# EAGLE board LCD&Control2PRNT (EAGLE 9.2.0)
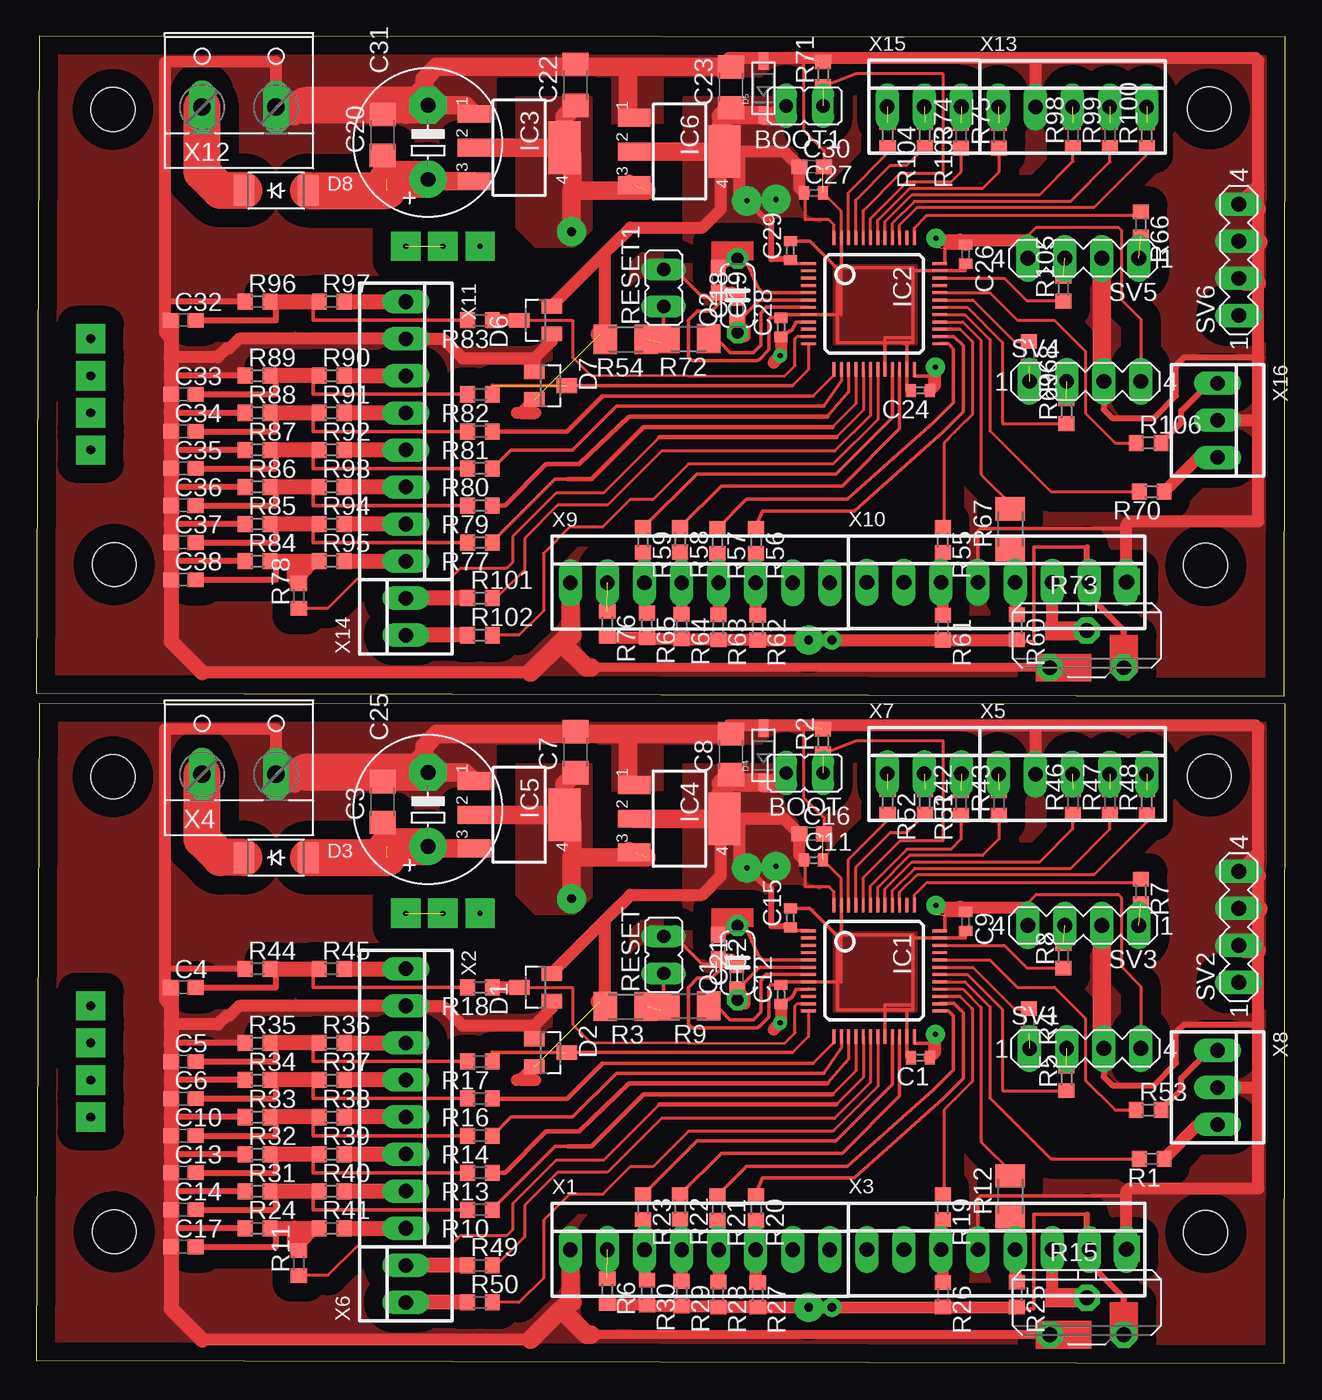
[diagram p0: board, top side]
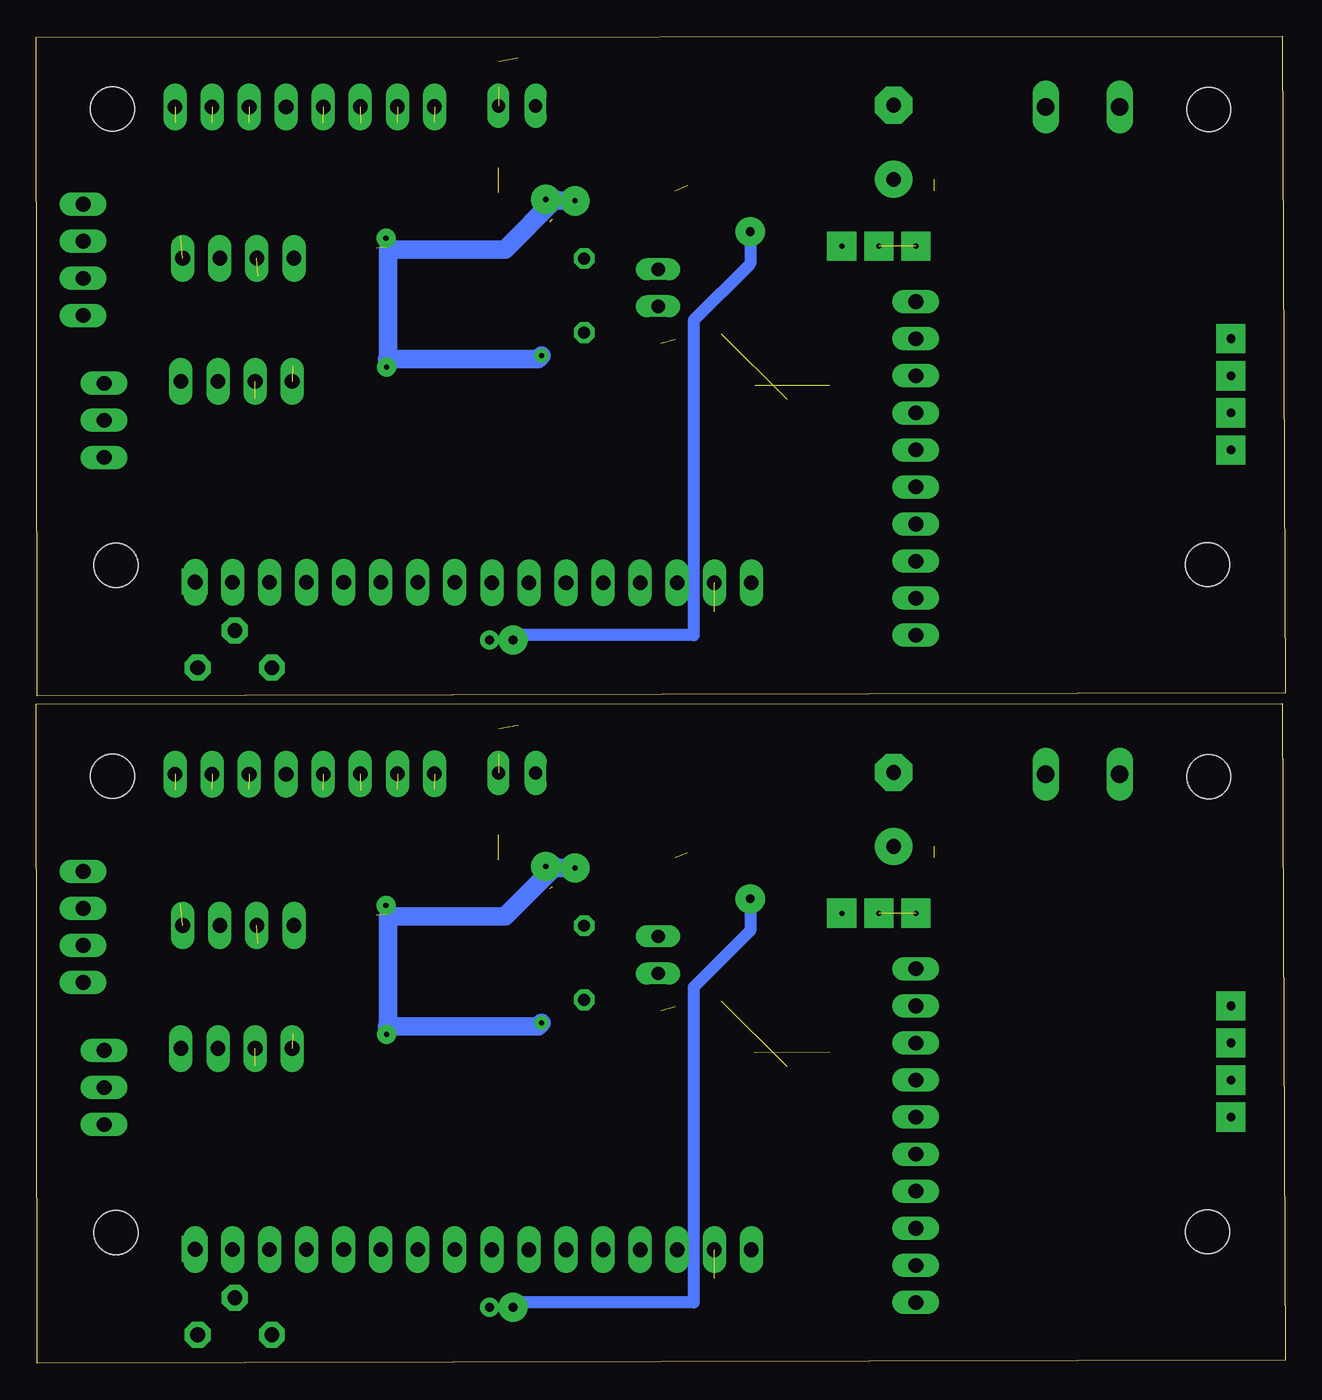
[diagram p1: board, bottom side, seen from below]

Size 85.58 x 90.91 mm. Coordinates in mm from the lower left corner, seen from the top.
Outline: 0,0.19 85.51,0 85.58,45.15 0.19,45.19 0,0.19
Outline: 0,45.91 85.51,45.72 85.58,90.87 0.19,90.91 0,45.91
Copper layers (1*16): Top 0.035mm / dielectric 1.5mm / Bottom 0.035mm
Design rules "DRC LCD part *": minimum track width 7mil, minimum drill 0.6mm, track to track 9mil, track to pad 10mil, pad to pad 12mil, via to via 12mil, smd to smd 2mil, copper to edge 40mil, drill to drill 40mil, minimum pad ring 12mil, minimum via ring 12mil, stop-mask expansion 4mil, vias tented up to drill 0mil, thermal gap 10mil
Holes 3 mm at 5.32,8.99 5.25,40.18 80.37,40.22 80.12,8.94 5.32,54.71 5.25,85.9 80.37,85.94 80.12,54.66

## Footprints (pad centres in the part's own frame; a part is rotated, then mirrored left to right if it is on the bottom)
JP1 = drill 0.914 long: 1 0,-1.27; 2 0,1.27
C0402 = smd 0.7 x 0.9: 1 -0.65,0; 2 0.65,0
C0603 = smd 1.1 x 1: 1 -0.85,0; 2 0.85,0
C1206 = smd 1.6 x 1.8: 1 -1.4,0; 2 1.4,0
E5-10,5 = drill 1.016 pad 2.54: + -2.54,0 | drill 1.016 pad 2.54 octagon: - 2.54,0
SOT23 = smd 1 x 1.4: 1 -0.95,-1.1; 2 0.95,-1.1; 3 0,1.1
SOD128 = smd 1.4 x 2.1: 1 -2.2,0; 2 2.2,0
SOD-123 = smd 1.2 x 0.7: A 1.85,0; C -1.85,0
TQFP48 = smd 0.2 x 1: 1 -2.75,-4.5; 2 -2.25,-4.5; 3 -1.75,-4.5; 4 -1.25,-4.5; 5 -0.75,-4.5; 6 -0.25,-4.5; 7 0.25,-4.5; 8 0.75,-4.5; 9 1.25,-4.5; 10 1.75,-4.5; 11 2.25,-4.5; 12 2.75,-4.5; 25 2.75,4.5; 26 2.25,4.5; 27 1.75,4.5; 28 1.25,4.5; 29 0.75,4.5; 30 0.25,4.5; 31 -0.25,4.5; 32 -0.75,4.5; 33 -1.25,4.5; 34 -1.75,4.5; 35 -2.25,4.5; 36 -2.75,4.5 | smd 1 x 0.2: 13 4.5,-2.75; 14 4.5,-2.25; 15 4.5,-1.75; 16 4.5,-1.25; 17 4.5,-0.75; 18 4.5,-0.25; 19 4.5,0.25; 20 4.5,0.75; 21 4.5,1.25; 22 4.5,1.75; 23 4.5,2.25; 24 4.5,2.75; 37 -4.5,2.75; 38 -4.5,2.25; 39 -4.5,1.75; 40 -4.5,1.25; 41 -4.5,0.75; 42 -4.5,0.25; 43 -4.5,-0.25; 44 -4.5,-0.75; 45 -4.5,-1.25; 46 -4.5,-1.75; 47 -4.5,-2.25; 48 -4.5,-2.75
SOT223 = smd 1.219 x 2.235: 1 -2.311,-3.099; 2 0,-3.099; 3 2.311,-3.099 | smd 3.6 x 2.2: 4 0,3.099
C050-024X044 = drill 0.813 octagon: 1 -2.54,0; 2 2.54,0
R0603 = smd 1 x 1.1: 1 -0.85,0; 2 0.85,0
M1206 = smd 1.6 x 2: 1 -1.4,0; 2 1.4,0
PT-10S = drill 1.016 pad 1.778 octagon: 1 -2.54,-1.27; 2 2.54,-1.27; 3 0,1.27
MA04-1 = drill 1.016 long: 1 -3.81,0; 2 -1.27,0; 3 1.27,0; 4 3.81,0
22-23-2081 = drill 1 long: 1 -8.89,0; 2 -6.35,0; 3 -3.81,0; 4 -1.27,0; 5 1.27,0; 6 3.81,0; 7 6.35,0; 8 8.89,0
W237-132 = drill 1.194 long: 1 -2.54,-0.635; 2 2.54,-0.635
22-23-2051 = drill 1 long: 1 -5.08,0; 2 -2.54,0; 3 0,0; 4 2.54,0; 5 5.08,0
22-23-2021 = drill 1 long: 1 -1.27,0; 2 1.27,0
22-23-2031 = drill 1 long: 1 -2.54,0; 2 0,0; 3 2.54,0

## Placement (x,y rotation side)
BOOT  [JP1]  52.64,40.44 90 top
BOOT1  [JP1]  52.64,86.16 90 top
C1  0.1  [C0402]  60.57,20.93 180 top
C2  22p  [C0603]  46.73,28.49 270 top
C3  0.1  [C1206]  23.72,38.44 90 top
C4  [C0603]  10.07,25.74 0 top
C5  [C0603]  10.07,20.66 0 top
C6  [C0603]  10.07,18.12 0 top
C7  0.1  [C1206]  36.94,41.86 90 top
C8  0.1  [C1206]  47.6,41.71 90 top
C9  0.1  [C0402]  63.67,30.26 270 top
C10  [C0603]  10.07,15.58 0 top
C11  0.1  [C0402]  53.25,34.47 0 top
C12  0.1  [C0402]  51.03,25.25 90 top
C13  [C0603]  10.07,13.04 0 top
C14  [C0603]  10.07,10.5 0 top
C15  0.1  [C0402]  51.66,30.51 90 top
C16  1uF  [C0603]  53.12,36.26 0 top
C17  [C0603]  10.07,7.96 0 top
C18  22p  [C0603]  47.99,72.16 90 top
C19  22p  [C0603]  46.73,74.21 270 top
C20  0.1  [C1206]  23.72,84.16 90 top
C21  22p  [C0603]  47.99,26.44 90 top
C22  0.1  [C1206]  36.94,87.58 90 top
C23  0.1  [C1206]  47.6,87.43 90 top
C24  0.1  [C0402]  60.57,66.65 180 top
C25  470uF  [E5-10,5]  26.84,37.93 90 top
C26  0.1  [C0402]  63.67,75.98 270 top
C27  0.1  [C0402]  53.25,80.19 0 top
C28  0.1  [C0402]  51.03,70.97 90 top
C29  0.1  [C0402]  51.66,76.23 90 top
C30  1uF  [C0603]  53.12,81.98 0 top
C31  470uF  [E5-10,5]  26.84,83.65 90 top
C32  [C0603]  10.07,71.46 0 top
C33  [C0603]  10.07,66.38 0 top
C34  [C0603]  10.07,63.84 0 top
C35  [C0603]  10.07,61.3 0 top
C36  [C0603]  10.07,58.76 0 top
C37  [C0603]  10.07,56.22 0 top
C38  [C0603]  10.07,53.68 0 top
D1  BAT54S  [SOT23]  34.2,25.74 90 top
D2  BAT54S  [SOT23]  35.23,21.26 270 top
D3  PMEG4050EP  [SOD128]  16.42,34.63 0 top
D4  3.6v  [SOD-123]  49.82,41.64 90 top
D5  3.6v  [SOD-123]  49.82,87.36 90 top
D6  BAT54S  [SOT23]  34.2,71.46 90 top
D7  BAT54S  [SOT23]  35.23,66.98 270 top
D8  PMEG4050EP  [SOD128]  16.42,80.35 0 top
IC1  STM32F10XCXT6  [TQFP48]  57.4,26.87 270 top
IC2  STM32F10XCXT6  [TQFP48]  57.4,72.59 270 top
IC3  5V  [SOT223]  33.08,83.29 270 top
IC4  3.3V  [SOT223]  44.06,37.3 270 top
IC5  5V  [SOT223]  33.08,37.57 270 top
IC6  3.3V  [SOT223]  44.06,83.02 270 top
Q1  8 Mgz  [C050-024X044]  48.04,27.43 90 top
Q2  8 Mgz  [C050-024X044]  48.04,73.15 90 top
R1  200  [R0603]  76.43,14 180 top
R2  10k  [R0603]  53.91,42.6 90 top
R3  10k  [M1206]  40.37,24.43 180 top
R4  200  [R0603]  68.02,23.43 270 top
R5  200  [R0603]  70.59,19.51 90 top
R6  470  [R0603]  39.12,4.94 270 top
R7  200  [R0603]  75.68,32.31 270 top
R8  200  [R0603]  70.37,27.9 90 top
R9  0  [M1206]  44.68,24.47 180 top
R10  200  [R0603]  30.39,10.5 180 top
R11  200  [R0603]  17.98,6.85 90 top
R12  200  [M1206]  66.73,11.42 90 top
R13  200  [R0603]  30.39,13.04 180 top
R14  200  [R0603]  30.39,15.58 180 top
R15  [PT-10S]  71.98,3.2 0 top
R16  200  [R0603]  30.39,18.12 180 top
R17  200  [R0603]  30.39,20.66 180 top
R18  200  [R0603]  30.39,25.74 180 top
R19  200  [R0603]  62.1,10.68 270 top
R20  [R0603]  49.31,10.63 270 top
R21  [R0603]  46.67,10.63 270 top
R22  [R0603]  44.11,10.71 270 top
R23  220  [R0603]  41.57,10.68 270 top
R24  200  [R0603]  15.15,9.23 0 top
R25  10k  [R0603]  67.18,4.7 270 top
R26  10k  [R0603]  62.13,4.67 270 top
R27  10k  [R0603]  49.43,4.67 270 top
R28  10k  [R0603]  46.72,4.7 270 top
R29  10k  [R0603]  44.21,4.75 270 top
R30  10k  [R0603]  41.83,4.83 270 top
R31  200  [R0603]  15.15,11.77 0 top
R32  200  [R0603]  15.15,14.31 0 top
R33  200  [R0603]  15.15,16.85 0 top
R34  200  [R0603]  15.15,19.39 0 top
R35  200  [R0603]  15.15,21.93 0 top
R36  200  [R0603]  20.23,21.93 0 top
R37  200  [R0603]  20.23,19.39 0 top
R38  200  [R0603]  20.23,16.85 0 top
R39  200  [R0603]  20.23,14.31 0 top
R40  200  [R0603]  20.23,11.77 0 top
R41  200  [R0603]  20.23,9.23 0 top
R42  200  [R0603]  63.36,38.38 90 top
R43  200  [R0603]  65.96,38.38 90 top
R44  200  [R0603]  15.15,27.01 0 top
R45  200  [R0603]  20.23,27.01 0 top
R46  200  [R0603]  71.03,38.44 90 top
R47  200  [R0603]  73.57,38.44 90 top
R48  200  [R0603]  76.09,38.43 90 top
R49  200  [R0603]  30.39,6.69 0 top
R50  200  [R0603]  30.39,4.15 0 top
R51  200  [R0603]  60.87,38.44 270 top
R52  200  [R0603]  58.33,38.44 270 top
R53  200  [R0603]  76.21,17.34 0 top
R54  10k  [M1206]  40.37,70.15 180 top
R55  200  [R0603]  62.1,56.4 270 top
R56  [R0603]  49.31,56.35 270 top
R57  [R0603]  46.67,56.35 270 top
R58  [R0603]  44.11,56.43 270 top
R59  220  [R0603]  41.57,56.4 270 top
R60  10k  [R0603]  67.18,50.42 270 top
R61  10k  [R0603]  62.13,50.39 270 top
R62  10k  [R0603]  49.43,50.39 270 top
R63  10k  [R0603]  46.72,50.42 270 top
R64  10k  [R0603]  44.21,50.47 270 top
R65  10k  [R0603]  41.83,50.55 270 top
R66  200  [R0603]  75.68,78.03 270 top
R67  200  [M1206]  66.73,57.14 90 top
R68  200  [R0603]  68.02,69.15 270 top
R69  200  [R0603]  70.59,65.23 90 top
R70  200  [R0603]  76.43,59.72 180 top
R71  10k  [R0603]  53.91,88.32 90 top
R72  0  [M1206]  44.68,70.19 180 top
R73  [PT-10S]  71.98,48.92 0 top
R74  200  [R0603]  63.36,84.1 90 top
R75  200  [R0603]  65.96,84.1 90 top
R76  470  [R0603]  39.12,50.66 270 top
R77  200  [R0603]  30.39,56.22 180 top
R78  200  [R0603]  17.98,52.57 90 top
R79  200  [R0603]  30.39,58.76 180 top
R80  200  [R0603]  30.39,61.3 180 top
R81  200  [R0603]  30.39,63.84 180 top
R82  200  [R0603]  30.39,66.38 180 top
R83  200  [R0603]  30.39,71.46 180 top
R84  200  [R0603]  15.15,54.95 0 top
R85  200  [R0603]  15.15,57.49 0 top
R86  200  [R0603]  15.15,60.03 0 top
R87  200  [R0603]  15.15,62.57 0 top
R88  200  [R0603]  15.15,65.11 0 top
R89  200  [R0603]  15.15,67.65 0 top
R90  200  [R0603]  20.23,67.65 0 top
R91  200  [R0603]  20.23,65.11 0 top
R92  200  [R0603]  20.23,62.57 0 top
R93  200  [R0603]  20.23,60.03 0 top
R94  200  [R0603]  20.23,57.49 0 top
R95  200  [R0603]  20.23,54.95 0 top
R96  200  [R0603]  15.15,72.73 0 top
R97  200  [R0603]  20.23,72.73 0 top
R98  200  [R0603]  71.03,84.16 90 top
R99  200  [R0603]  73.57,84.16 90 top
R100  200  [R0603]  76.09,84.15 90 top
R101  200  [R0603]  30.39,52.41 0 top
R102  200  [R0603]  30.39,49.87 0 top
R103  200  [R0603]  60.87,84.16 270 top
R104  200  [R0603]  58.33,84.16 270 top
R105  200  [R0603]  70.37,73.62 90 top
R106  200  [R0603]  76.21,63.06 0 top
RESET  [JP1]  42.98,27.97 0 top
RESET1  [JP1]  42.98,73.69 0 top
SV1  [MA04-1]  71.87,21.55 0 top
SV2  [MA04-1]  82.38,29.88 90 top
SV3  [MA04-1]  71.74,29.98 180 top
SV4  [MA04-1]  71.87,67.27 0 top
SV5  [MA04-1]  71.74,75.7 180 top
SV6  [MA04-1]  82.38,75.6 90 top
X1  22-23-2081  [22-23-2081]  45.48,7.76 0 top
X2  22-23-2081  [22-23-2081]  25.31,18.12 270 top
X3  22-23-2081  [22-23-2081]  65.8,7.79 0 top
X4  [W237-132]  13.88,40.98 0 top
X5  22-23-2051  [22-23-2051]  71.01,40.36 0 top
X6  22-23-2021  [22-23-2021]  25.31,5.42 90 top
X7  22-23-2031  [22-23-2031]  60.85,40.37 0 top
X8  22-23-2031  [22-23-2031]  80.94,18.88 270 top
X9  22-23-2081  [22-23-2081]  45.48,53.48 0 top
X10  22-23-2081  [22-23-2081]  65.8,53.51 0 top
X11  22-23-2081  [22-23-2081]  25.31,63.84 270 top
X12  [W237-132]  13.88,86.7 0 top
X13  22-23-2051  [22-23-2051]  71.01,86.08 0 top
X14  22-23-2021  [22-23-2021]  25.31,51.14 90 top
X15  22-23-2031  [22-23-2031]  60.85,86.09 0 top
X16  22-23-2031  [22-23-2031]  80.94,64.6 270 top

## Library data of the parts
BOOT BOOT1 RESET RESET1 = jumper
C1-C3 C7-C9 C11 C12 C15 C16 C18-C31 Q1 Q2 R1-R106 = rcl
C4-C6 C10 C13 C14 C17 C32-C38 = rcl; SPICEPREFIX: C
D1 D2 D6 D7 = diode
D3 D8 = nxp_60
D4 D5 = adafruit
IC1 IC2 = stm32(1)
IC3-IC6 = v-reg-2
SV1-SV6 = con-lstb; OC_FARNELL: unknown; OC_NEWARK: unknown
X1-X3 X9-X11 = con-molex; MF: MOLEX; MPN: 22-23-2081; OC_FARNELL: 1756826; OC_NEWARK: 01C7592
X4 X12 = con-wago-508; OC_FARNELL: unknown; OC_NEWARK: unknown
X5 X13 = con-molex; MF: MOLEX; MPN: 22-23-2051; OC_FARNELL: 1462952; OC_NEWARK: 38C9178
X6 X14 = con-molex; MF: MOLEX; MPN: 22-23-2021; OC_FARNELL: 1462926; OC_NEWARK: 25C3832
X7 X8 X15 X16 = con-molex; MF: MOLEX; MPN: 22-23-2031; OC_FARNELL: 1462950; OC_NEWARK: 30C0862

## Nets
+3V1: BOOT1.2 C23.1 C24.1 C26.1 C27.1 C28.1 C29.1 C30.1 D5.C D6.2 D7.2 IC2.1 IC2.9 IC2.24 IC2.36 IC2.48 IC6.2 IC6.4 R54.2 SV4.4 SV5.4
+3V3: BOOT.2 C1.1 C8.1 C9.1 C11.1 C12.1 C15.1 C16.1 D1.2 D2.2 D4.C IC1.1 IC1.9 IC1.24 IC1.36 IC1.48 IC4.2 IC4.4 R3.2 SV1.4 SV3.4
+5V: C7.1 IC4.3 IC5.2 IC5.4 R6.2 R15.2 R25.2 R26.2 R27.2 R28.2 R29.2 R30.2 X3.7
+5V1: C22.1 IC3.2 IC3.4 IC6.3 R60.2 R61.2 R62.2 R63.2 R64.2 R65.2 R73.2 R76.2 X10.7
+12V: C3.1 C25.+ D3.2 IC5.3
+12V1: C20.1 C31.+ D8.2 IC3.3
GND: C1.2 C2.2 C3.2 C4.1 C5.1 C6.1 C7.2 C8.2 C9.2 C10.1 C11.2 C12.2 C13.1 C14.1 C15.2 C16.2 C17.1 C21.2 C25.- D1.1 D2.1 D4.A IC1.8 IC1.20 IC1.23 IC1.35 IC1.47 IC4.1 IC5.1 R2.2 R15.1 R24.1 R31.1 R32.1 R33.1 R34.1 R35.1 R44.1 RESET.2 SV1.3 SV2.2 SV2.3 SV2.4 SV3.2 X1.1 X2.2 X3.4 X3.8 X4.2 X5.2 X8.2
GND1: C18.2 C19.2 C20.2 C22.2 C23.2 C24.2 C26.2 C27.2 C28.2 C29.2 C30.2 C31.- C32.1 C33.1 C34.1 C35.1 C36.1 C37.1 C38.1 D5.A D6.1 D7.1 IC2.8 IC2.20 IC2.23 IC2.35 IC2.47 IC3.1 IC6.1 R71.2 R73.1 R84.1 R85.1 R86.1 R87.1 R88.1 R89.1 R96.1 RESET1.2 SV4.3 SV5.2 SV6.2 SV6.3 SV6.4 X9.1 X10.4 X10.8 X11.2 X12.2 X13.2 X16.2
N$1: IC1.29 R1.2
N$3: C21.1 IC1.6 Q1.1
N$4: C2.1 IC1.5 Q1.2
N$5: IC1.37 R7.1
N$6: IC1.34 R8.1
N$7: R7.2 SV3.1
N$8: R3.1 R9.2 RESET.1
N$9: IC1.7 R9.1
N$10: IC1.31 R4.1
N$11: IC1.30 R5.1
N$12: R4.2 SV1.1
N$13: R6.1 X1.2
N$17: R15.3 X3.6
N$21: D3.1 X4.1
N$22: R22.2 R29.1 X1.4
N$23: C17.2 R11.2 R24.2 R41.1
N$24: R52.1 X7.1
N$26: R1.1 X8.3
N$27: IC1.46 R52.2
N$29: R43.2 X5.1
N$30: R21.2 R28.1 X1.5
N$31: D1.3 IC1.11 R18.1
N$32: R20.2 R27.1 X1.6
N$33: R19.2 R26.1 X3.3
N$34: R23.2 R30.1 X1.3
N$35: R12.1 R25.1 X3.5
N$36: IC1.21 R23.1
N$37: IC1.22 R22.1
N$38: IC1.25 R21.1
N$44: IC1.45 R51.2
N$67: R47.2 X5.4
N$69: R5.2 SV1.2
N$73: R46.2 X5.3
N$78: R48.2 X5.5
N$79: R51.1 X7.2
N$107: R8.2 SV3.3
N$109: IC1.18 R49.2
N$112: IC1.43 R42.1
N$113: D2.3 IC1.12 R17.1
N$115: BOOT.1 IC1.44 R2.1
N$117: R42.2 X7.3
N$123: IC1.42 R43.1
N$127: C14.2 R10.2 R31.2 R40.1
N$129: C13.2 R13.2 R32.2 R39.1
N$130: R38.2 X2.5
N$131: IC1.13 R16.1
N$132: IC1.19 R50.2
N$134: IC1.14 R14.1
N$135: C6.2 R16.2 R34.2 R37.1
N$138: C5.2 R17.2 R35.2 R36.1
N$140: IC1.26 R20.1
N$141: IC1.27 R19.1
N$142: IC1.28 R12.2
N$143: R49.1 X6.2
N$160: IC1.15 R13.1
N$162: IC1.16 R10.1
N$164: R45.2 X2.1
N$165: IC1.41 R46.1
N$169: IC1.17 R11.1
N$170: R50.1 X6.1
N$171: IC1.40 R47.1
N$172: IC1.39 R48.1
N$173: C4.2 R18.2 R44.2 R45.1
N$174: R36.2 X2.3
N$175: R37.2 X2.4
N$176: R53.2 X8.1
N$177: IC1.32 R53.1
N$178: C10.2 R14.2 R33.2 R38.1
N$179: R39.2 X2.6
N$180: C18.1 IC2.6 Q2.1
N$181: C19.1 IC2.5 Q2.2
N$182: R59.2 R65.1 X9.3
N$184: R40.2 X2.7
N$186: BOOT1.1 IC2.44 R71.1
N$187: R58.2 R64.1 X9.4
N$193: R57.2 R63.1 X9.5
N$194: R56.2 R62.1 X9.6
N$195: R55.2 R61.1 X10.3
N$197: R60.1 R67.1 X10.5
N$198: IC2.21 R59.1
N$199: R41.2 X2.8
N$206: IC2.22 R58.1
N$208: IC2.25 R57.1
N$209: IC2.26 R56.1
N$214: IC2.27 R55.1
N$217: IC2.28 R67.2
N$218: IC2.34 R105.1
N$220: IC2.31 R68.1
N$221: IC2.30 R69.1
N$222: R68.2 SV4.1
N$223: R69.2 SV4.2
N$226: R66.2 SV5.1
N$227: IC2.37 R66.1
N$229: R105.2 SV5.3
N$230: R54.1 R72.2 RESET1.1
N$231: R76.1 X9.2
N$238: IC2.29 R70.2
N$241: IC2.7 R72.1
N$242: R73.3 X10.6
N$250: D6.3 IC2.11 R83.1
N$257: D7.3 IC2.12 R82.1
N$258: IC2.13 R81.1
N$259: IC2.14 R80.1
N$260: IC2.15 R79.1
N$261: IC2.16 R77.1
N$262: IC2.17 R78.1
N$268: C38.2 R78.2 R84.2 R95.1
N$269: C37.2 R77.2 R85.2 R94.1
N$270: C36.2 R79.2 R86.2 R93.1
N$271: R92.2 X11.5
N$272: C34.2 R81.2 R88.2 R91.1
N$273: C33.2 R82.2 R89.2 R90.1
N$274: R97.2 X11.1
N$275: C32.2 R83.2 R96.2 R97.1
N$276: R90.2 X11.3
N$277: R91.2 X11.4
N$278: C35.2 R80.2 R87.2 R92.1
N$279: R93.2 X11.6
N$280: R94.2 X11.7
N$281: R95.2 X11.8
N$282: D8.1 X12.1
N$283: R98.2 X13.3
N$284: R99.2 X13.4
N$285: R100.2 X13.5
N$286: IC2.43 R74.1
N$287: IC2.42 R75.1
N$288: IC2.41 R98.1
N$289: IC2.40 R99.1
N$290: IC2.39 R100.1
N$291: IC2.18 R101.2
N$292: IC2.19 R102.2
N$293: R101.1 X14.2
N$294: R102.1 X14.1
N$295: IC2.46 R104.2
N$296: IC2.45 R103.2
N$297: IC2.32 R106.1
N$298: R75.2 X13.1
N$299: R104.1 X15.1
N$300: R103.1 X15.2
N$301: R74.2 X15.3
N$302: R70.1 X16.3
N$303: R106.2 X16.1

## Tracks (layer width: path | path; a pad name or v marks a point on that pad's centre or on a via)
+3V1  (via drill 0.35, 0.35 pad 1.3, 0.35 pad 2)  (3 unrouted)
  Top 0.2: C28.1 51.03,69.1 v50.97,69.04
  Top 0.203: SV5.4 67.93,77.25 68.52,77.84 74.13,77.84 74.33,77.63 74.33,72.88 75.68,71.54 SV4.4 | IC2.48 54.65,78.01 54.32,78.35 52.69,78.35 52.69,80.1 C27.1
  Top 0.254: IC2.24 60.17,68.09 60.17,67.62 61.22,67.62 C24.1 | IC2.36 62.26,75.34 62.26,76.39 63.67,76.39 C26.1 | C29.1 51.77,75.58 51.99,75.36 52.89,75.36 IC2.1 | 52.9,71.32 IC2.9 52.88,71.32 52.06,71.32 51.8,70.81 C28.1 | 63.42,77.1 63.31,76.99 | IC2.48
  Top 0.406: v61.63,77.09 61.77,76.95 | C29.1 51.6,75.64 50.37,75.64 50.37,78.23 | 50.23,78.37 49.95,78.37 v48.68,79.64
  Top 0.813: C26.1 63.31,76.99 | C24.1 61.6,67.02 v61.6,68.24 | 50.01,85.32 D5.C | 35.47,72.58 arc-90 D6.2 38.97,76.08 | D7.2 33.21,65.11 | 33.21,65.11 32.93,65.11 | 33.21,65.11 34.2,65.11 | SV5.4 67.93,76.95 61.77,76.95 | C27.1 52.27,80.51 C30.1 51.23,83.02 48.17,83.02 | 48.17,83.02 IC6.4 | v48.68,79.64 48.17,80.15 48.17,83.02 | 46.9,82.89 46.9,79.08 45.63,77.81 40.7,77.81 39.36,76.47 38.97,76.08 | R54.2 38.97,76.08
  Top 1.27: R54.2 38.62,70.51 | 46.94,84.87 46.9,84.84 47.16,84.58 IC6.4 IC6.2 | BOOT1.2 50.71,85.5 50.71,85.43 49.9,85.43 D5.C 46.98,85.51 46.9,85.43
  Bottom 0.406: v61.6,68.24 61.79,68.43 61.47,68.88 | 61.47,76.31 61.63,76.48 v61.63,77.09
  Bottom 1.27: v50.97,69.04 51.21,68.8 61.56,68.8 61.47,68.88 61.47,76.31 53.48,76.31 50.05,79.74 49.95,79.64 v48.68,79.64
  other vias: 50.67,79.74
  pour Top (isolate 1.27, no thermals): 44.36,86.7 55.79,86.7 55.79,76.54 44.36,76.54
+3V3  (via drill 0.35, 0.35 pad 1.3, 0.35 pad 2)  (3 unrouted)
  Top 0.2: C12.1 51.03,23.38 v50.97,23.32
  Top 0.203: SV3.4 67.93,31.53 68.52,32.12 74.13,32.12 74.33,31.91 74.33,27.16 75.68,25.82 SV1.4 | IC1.48 54.65,32.29 54.32,32.63 52.69,32.63 52.69,34.38 C11.1
  Top 0.254: IC1.24 60.17,22.37 60.17,21.9 61.22,21.9 C1.1 | IC1.36 62.26,29.62 62.26,30.67 63.67,30.67 C9.1 | C15.1 51.77,29.85 51.99,29.64 52.89,29.64 IC1.1 | 52.9,25.6 IC1.9 52.88,25.6 52.06,25.6 51.8,25.09 C12.1 | 63.42,31.38 63.31,31.27 | IC1.48
  Top 0.406: v61.63,31.37 61.77,31.23 | C15.1 51.6,29.92 50.37,29.92 50.37,32.51 | 50.23,32.65 49.95,32.65 v48.68,33.92
  Top 0.813: C9.1 63.31,31.27 | C1.1 61.6,21.3 v61.6,22.52 | 50.01,39.6 D4.C | 35.47,26.86 arc-90 D1.2 38.97,30.36 | D2.2 33.21,19.39 | 33.21,19.39 32.93,19.39 | 33.21,19.39 34.2,19.39 | SV3.4 67.93,31.23 61.77,31.23 | C11.1 52.27,34.79 C16.1 51.23,37.3 48.17,37.3 | 48.17,37.3 IC4.4 | v48.68,33.92 48.17,34.43 48.17,37.3 | 46.9,37.17 46.9,33.36 45.63,32.09 40.7,32.09 39.36,30.75 38.97,30.36 | R3.2 38.97,30.36
  Top 1.27: R3.2 38.62,24.79 | 46.94,39.15 46.9,39.12 47.16,38.86 IC4.4 IC4.2 | BOOT.2 50.71,39.78 50.71,39.71 49.9,39.71 D4.C 46.98,39.79 46.9,39.71
  Bottom 0.406: v61.6,22.52 61.79,22.71 61.47,23.16 | 61.47,30.59 61.63,30.76 v61.63,31.37
  Bottom 1.27: v50.97,23.32 51.21,23.08 61.56,23.08 61.47,23.16 61.47,30.59 53.48,30.59 50.05,34.02 49.95,33.92 v48.68,33.92
  other vias: 50.67,34.02
  pour Top (isolate 1.27, no thermals): 44.36,40.98 55.79,40.98 55.79,30.82 44.36,30.82
+5V  (via drill 0.6 pad 1.3, 0.6 pad 2)  (1 unrouted)
  Top 0.254: 71.98,10.18 68.36,10.18 68.36,3.71 67.18,3.71 R25.2
  Top 0.406: 71.98,7.78 71.98,10.18 | R15.2 74.52,4.47 72.3,6.69 72.3,7.33 71.67,7.96 71.97,7.96 X3.7
  Top 0.813: R25.2 67.16,3.82 R26.2 v54.52,3.82 v52.92,3.82 R27.2 49.4,3.85 R28.2 46.67,3.9 R29.2 41.91,3.9 R30.2 39.23,3.98 R6.2 | X3.7 71.98,7.78 | IC4.3 40.64,35.31
  Top 1.27: IC5.2 IC5.4 | IC5.4 36.18,39.7 C7.1 | IC5.4 36.74,37.01 36.74,34.63 | 36.74,34.63 39.28,34.63 41.82,34.63 | 36.74,34.63 36.67,34.63 v36.67,31.81
  Bottom 0.813: v36.67,31.81 36.67,29.63 40.55,25.74 40.55,4.15 52.59,4.15 v52.92,3.82
  pour Top (isolate 1.27, no thermals): 32.93,40.98 38.01,40.98 38.01,30.82 34.2,30.82 32.93,32.09
+5V1  (via drill 0.6 pad 1.3, 0.6 pad 2)  (1 unrouted)
  Top 0.254: 71.98,55.9 68.36,55.9 68.36,49.43 67.18,49.43 R60.2
  Top 0.406: 71.98,53.5 71.98,55.9 | R73.2 74.52,50.19 72.3,52.41 72.3,53.05 71.67,53.68 71.97,53.68 X10.7
  Top 0.813: R60.2 67.16,49.54 R61.2 v54.52,49.54 v52.92,49.54 R62.2 49.4,49.57 R63.2 46.67,49.62 R64.2 41.91,49.62 R65.2 39.23,49.7 R76.2 | X10.7 71.98,53.5 | IC6.3 40.64,81.03
  Top 1.27: IC3.2 IC3.4 | IC3.4 36.18,85.42 C22.1 | IC3.4 36.74,82.73 36.74,80.35 | 36.74,80.35 39.28,80.35 41.82,80.35 | 36.74,80.35 36.67,80.35 v36.67,77.53
  Bottom 0.813: v36.67,77.53 36.67,75.35 40.55,71.46 40.55,49.87 52.59,49.87 v52.92,49.54
  pour Top (isolate 1.27, no thermals): 32.93,86.7 38.01,86.7 38.01,76.54 34.2,76.54 32.93,77.81
+12V  (1 unrouted)
  Top 1.27: IC5.3 26.98,35.25 C25.+ | 24.04,35.39 23.72,35.71 C3.1
  Top 2.54: 24.04,35.39 C25.+ | D3.2 24.04,34.63
+12V1  (1 unrouted)
  Top 1.27: IC3.3 26.98,80.97 C31.+ | 24.04,81.11 23.72,81.43 C20.1
  Top 2.54: 24.04,81.11 C31.+ | D8.2 24.04,80.35
GND  (2 unrouted)
  Top 0.203: 52.57,43.7 52.57,38.77 53.97,37.36 C16.2 | IC1.47 55.15,33.21 C11.2
  Top 0.254: IC1.47 55.15,29.36 55.25,29.36 55.25,29.34 60.07,29.34 60.07,29.12 | 60.07,29.12 60.07,24.54 | 60.07,24.54 60.07,24.21 59.67,24.21 | 59.36,24.21 54.89,24.21 54.89,26.06 | 54.89,26.06 54.89,29.29 | 54.89,29.29 55.12,29.29 55.12,26.12 | 60.07,29.12 IC1.35 63.67,29.12 C9.2 | 59.59,24.21 59.36,24.21 | 59.36,24.21 59.36,24.18 59.59,24.18 59.59,24.21 | 59.59,24.21 59.67,24.21 | 59.67,24.21 59.67,22.37 IC1.23 59.65,20.93 C1.2 | IC1.20 58.15,24.54 60.07,24.54 | IC1.47 | IC1.47 | 54.89,26.06 54.83,26.12 IC1.8 51.08,26.12 C12.2 50.3,25.9 50.18,25.79 50.18,23.71 49.53,23.06 49.5,23.06 49.42,22.97 44.91,22.97 44.68,23.2 44.68,25.74 45.31,26.38 46.27,26.38 46.9,27.01 46.9,27.47 C2.2 46.42,27.33 45.63,27.33 43.73,29.23 RESET.2 | C15.2 53.02,31.15 54.89,29.29 | X3.4 64.53,11.3 64.68,11.46 74.37,11.46 74.69,11.14 | 54.24,36.6 C16.2
  Top 0.406: X3.8 74.69,11.14 74.69,11.77 | 83.73,16.85 83.73,18.88 83.73,23.2 | 83.73,23.2 83.73,28.28 83.73,31.1 83.73,33.36 83.73,34.63 83.73,43.52 | R31.1 9.22,11.77 | R24.1 9.22,9.23 | R32.1 9.22,14.31 | R33.1 9.22,16.85 | R34.1 9.22,19.39 | R35.1 9.22,21.93 | R44.1 8.8,27.01 8.8,24.89 9.22,24.47 | SV1.3 73.14,19.62 73.72,19.04 76.57,19.04 78.09,20.56 78.09,22.64 78.65,23.2 83.73,23.2
  Top 0.61: C16.2 53.9,36.19 | R15.1 38.01,1.93 37.53,1.93
  Top 0.813: C2.2 47.64,27.64 C21.2 | 9.22,23.2 12.43,23.2 13.03,23.8 13.21,23.8 13.88,24.47 X2.2 27.85,24.47 29.19,23.13 34.13,23.13 | X4.2 16.42,43.45 | 16.42,43.45 | 16.42,43.45 8.8,43.42 8.8,24.89 9.22,24.47 | D1.1 35.3,24.3 34.13,23.13 | 34.13,23.13 D2.1 | 33.87,1.58 11.37,1.58 | X3.8 74.69,11.77 74.88,11.96 83.73,11.96 83.73,16.85 83.73,23.2 83.73,34.63 | X8.2 83.73,18.88 | SV2.4 83.73,35.04 83.73,43.52 | 83.73,43.52 83.66,43.52 | 83.73,43.52 83.55,43.7 68.49,43.7 | C8.2 47.6,43.43 47.38,43.65 47.43,43.7 52.57,43.7 68.49,43.7 | X5.2 68.49,40.39 68.49,43.7
  Top 1.016: C4.1 9.22,24.47 9.22,23.2 9.22,21.93 9.22,19.39 9.22,16.85 9.22,14.31 9.22,11.77 9.22,9.23 C17.1 9.22,3.73 11.37,1.58 | SV2.3 82.44,31.1 82.46,31.1 | SV2.2 82.72,28.28 83.73,28.28 | SV2.4 83.4,33.69 83.73,33.36
  Top 1.27: IC5.1 29.39,40.47 C25.- | 47.56,43.07 C8.2 40.55,43.11 | C7.2 36.97,43.28 | 83.73,31.1 82.46,31.1 | 17.69,39.71 18.33,40.35 X4.2 | 36.59,6.35 X1.1 36.59,4.3 | 36.59,4.3 36.74,4.15 | 33.87,1.58 35.95,3.67 | 35.95,3.67 36.59,4.3 | 38.01,1.93 37.69,1.93 35.95,3.67 | SV3.2 73.01,21.68 SV1.3 | 40.55,43.11 27.44,43.11 26.58,42.25 26.58,41.74 25.31,40.47 | IC4.1 40.55,40.02 40.55,43.11
  Top 2.54: C25.- 25.31,40.47 18.41,40.47
  pour Top (isolate 0.406, rank 2, no thermals): 54.65,29.55 60.29,29.55 60.29,24.07 54.65,24.07
  pour Top (isolate 1.27, rank 3, no thermals): -0.09,44.79 85,44.79 85,0.34 -0.09,0.34
GND1  (2 unrouted)
  Top 0.203: 52.57,89.42 52.57,84.49 53.97,83.08 C30.2 | IC2.47 55.15,78.93 C27.2
  Top 0.254: IC2.47 55.15,75.08 55.25,75.08 55.25,75.06 60.07,75.06 60.07,74.84 | 60.07,74.84 60.07,70.26 | 60.07,70.26 60.07,69.93 59.67,69.93 | 59.36,69.93 54.89,69.93 54.89,71.78 | 54.89,71.78 54.89,75.01 | 54.89,75.01 55.12,75.01 55.12,71.84 | 60.07,74.84 IC2.35 63.67,74.84 C26.2 | 59.59,69.93 59.36,69.93 | 59.36,69.93 59.36,69.9 59.59,69.9 59.59,69.93 | 59.59,69.93 59.67,69.93 | 59.67,69.93 59.67,68.09 IC2.23 59.65,66.65 C24.2 | IC2.20 58.15,70.26 60.07,70.26 | IC2.47 | IC2.47 | 54.89,71.78 54.83,71.84 IC2.8 51.08,71.84 C28.2 50.3,71.62 50.18,71.51 50.18,69.43 49.53,68.78 49.5,68.78 49.42,68.69 44.91,68.69 44.68,68.92 44.68,71.46 45.31,72.1 46.27,72.1 46.9,72.73 46.9,73.19 C19.2 46.42,73.05 45.63,73.05 43.73,74.95 RESET1.2 | C29.2 53.02,76.87 54.89,75.01 | X10.4 64.53,57.02 64.68,57.18 74.37,57.18 74.69,56.86 | 54.24,82.32 C30.2
  Top 0.406: X10.8 74.69,56.86 74.69,57.49 | 83.73,62.57 83.73,64.6 83.73,68.92 | 83.73,68.92 83.73,74 83.73,76.82 83.73,79.08 83.73,80.35 83.73,89.24 | R85.1 9.22,57.49 | R84.1 9.22,54.95 | R86.1 9.22,60.03 | R87.1 9.22,62.57 | R88.1 9.22,65.11 | R89.1 9.22,67.65 | R96.1 8.8,72.73 8.8,70.61 9.22,70.19 | SV4.3 73.14,65.34 73.72,64.76 76.57,64.76 78.09,66.28 78.09,68.36 78.65,68.92 83.73,68.92
  Top 0.61: C30.2 53.9,81.91 | R73.1 38.01,47.65 37.53,47.65
  Top 0.813: C19.2 47.64,73.36 C18.2 | 9.22,68.92 12.43,68.92 13.03,69.52 13.21,69.52 13.88,70.19 X11.2 27.85,70.19 29.19,68.85 34.13,68.85 | X12.2 16.42,89.17 | 16.42,89.17 | 16.42,89.17 8.8,89.14 8.8,70.61 9.22,70.19 | D6.1 35.3,70.02 34.13,68.85 | 34.13,68.85 D7.1 | 33.87,47.3 11.37,47.3 | X10.8 74.69,57.49 74.88,57.68 83.73,57.68 83.73,62.57 83.73,68.92 83.73,80.35 | X16.2 83.73,64.6 | SV6.4 83.73,80.76 83.73,89.24 | 83.73,89.24 83.66,89.24 | 83.73,89.24 83.55,89.42 68.49,89.42 | C23.2 47.6,89.15 47.38,89.37 47.43,89.42 52.57,89.42 68.49,89.42 | X13.2 68.49,86.11 68.49,89.42
  Top 1.016: C32.1 9.22,70.19 9.22,68.92 9.22,67.65 9.22,65.11 9.22,62.57 9.22,60.03 9.22,57.49 9.22,54.95 C38.1 9.22,49.45 11.37,47.3 | SV6.3 82.44,76.82 82.46,76.82 | SV6.2 82.72,74 83.73,74 | SV6.4 83.4,79.41 83.73,79.08
  Top 1.27: IC3.1 29.39,86.19 C31.- | 47.56,88.79 C23.2 40.55,88.83 | C22.2 36.97,89 | 83.73,76.82 82.46,76.82 | 17.69,85.43 18.33,86.07 X12.2 | 36.59,52.07 X9.1 36.59,50.02 | 36.59,50.02 36.74,49.87 | 33.87,47.3 35.95,49.39 | 35.95,49.39 36.59,50.02 | 38.01,47.65 37.69,47.65 35.95,49.39 | SV5.2 73.01,67.4 SV4.3 | 40.55,88.83 27.44,88.83 26.58,87.97 26.58,87.46 25.31,86.19 | IC6.1 40.55,85.74 40.55,88.83
  Top 2.54: C31.- 25.31,86.19 18.41,86.19
  pour Top (isolate 0.406, rank 2, no thermals): 54.65,75.27 60.29,75.27 60.29,69.79 54.65,69.79
  pour Top (isolate 1.27, rank 3, no thermals): -0.09,90.51 85,90.51 85,46.06 -0.09,46.06
N$1
  Top 0.203: IC1.29 63.64,26.12 65.34,24.42 65.34,18.17 | 65.34,18.17 65.32,18.15 | 65.34,18.17 69.52,13.99 R1.2
N$3
  Top 0.254: IC1.6 49.55,27.12 48.49,26.06 48.49,24.7 48.55,24.64
  Top 0.813: Q1.1 48.55,24.64 48.55,25.03 C21.1
N$4
  Top 0.254: IC1.5 49.78,27.62 49.44,27.96 48.81,29.46 Q1.2
  Top 0.813: Q1.2 47.11,29.72 C2.1
N$5
  Top 0.203: IC1.37 60.15,32.06 61,32.91 61,32.93 75.63,32.93 75.68,32.98 R7.1
N$6
  Top 0.203: IC1.34 66.32,28.62 67.86,27.09 70.33,27.09 R8.1
N$7  (1 unrouted)
N$8  (1 unrouted)
  Top 0.254: RESET.1 42.98,24.36 42.77,24.15 42.96,24.15 R9.2
N$9
  Top 0.254: IC1.7 50,26.62 49.76,26.38 49.76,26.32 49.7,26.26 49.68,26.26 49.65,26.23 49.65,24.05 49.12,23.52 47.54,23.52 46.9,24.15 46.4,24.15 R9.1
N$10
  Top 0.203: IC1.31 64.16,27.12 67.01,24.28 R4.1
N$11
  Top 0.203: IC1.30 63.8,26.62 66.21,24.22 66.21,18.66 R5.1
N$12  (1 unrouted)
N$13  (1 unrouted)
  Top 1.27: X1.2
N$15  (via drill 0.35 pad 2)  (1 unrouted)
  other vias: 27.85,30.82 25.31,30.82
N$17
  Top 0.813: R15.3 69.61,4.47 X3.6
N$21
  Top 2.54: D3.1 12.61,34.63 11.34,35.9 X4.1
N$22
  Top 0.813: R29.1 X1.4 44.21,9.75 R22.2
N$23
  Top 0.254: 18.96,9.23 R41.1
  Top 0.406: C17.2 16.42,7.96 16.42,9.23
  Top 1.016: R24.2 16.42,9.23 17.69,9.23 | 17.69,9.23 18.96,9.23 17.98,8.25 R11.2 17.69,7.99 17.69,9.23
N$24  (1 unrouted)
N$26
  Top 0.813: R1.1 79.63,16.34 X8.3
N$27
  Top 0.203: IC1.46 55.65,34.5 58.33,37.17 R52.2
N$29  (1 unrouted)
N$30
  Top 0.813: R21.2 46.75,9.7 X1.5 46.75,5.57 R28.1
N$31
  Top 0.203: IC1.11 52.13,24.62 51.98,24.47 51.98,22.63 51.24,21.89 38.01,21.93 36.77,23.18 36.77,25.72 32.47,25.72 32.45,25.74
  Top 0.813: D1.3 32.45,25.74 R18.1
N$32
  Top 0.813: R20.2 49.29,9.75 X1.6 49.29,5.66 R27.1
N$33
  Top 0.813: R26.1 62.13,7.65 X3.3 61.99,9.72 R19.2
N$34
  Top 0.813: R30.1 41.67,5.84 X1.3 41.67,9.73 R23.2
N$35
  Top 0.254: R12.1 67.07,10.11 X3.5
  Top 0.813: X3.5 67.07,5.66 R25.1
N$36
  Top 0.254: IC1.21 58.65,19.08 54.79,15.21 45.25,15.21 R23.1
N$37
  Top 0.254: IC1.22 59.15,18.31 55.22,14.38 46.93,14.38 R22.1
N$38
  Top 0.254: IC1.25 62.49,24.12 62.84,23.77 62.84,20.09 61.51,18.76 55.56,13.47 48.67,13.47 R21.1
N$44
  Top 0.203: IC1.45 56.15,33.98 58.53,36.36 59.64,36.36 R51.2
N$67  (1 unrouted)
N$69  (1 unrouted)
N$73  (1 unrouted)
N$78  (1 unrouted)
N$79  (1 unrouted)
N$105  (via drill 1 pad 1.78)
  other vias: 74.73,7.82
N$107  (1 unrouted)
N$109
  Top 0.203: IC1.18 57.15,19.22 54.7,16.76 42.82,16.76 39.13,13.07 35.73,13.07 33.45,10.79 33.45,8.64 31.51,6.69 R49.2
N$112
  Top 0.203: R42.1 63.36,35.9 62.66,35.2 59.65,35.2 57.15,32.71 IC1.43
N$113  (1 unrouted)
  Top 0.203: IC1.12 52.9,22.37 51.8,21.27
  Top 0.254: 51.8,21.27 31.24,21.27
  Top 0.305: R17.1 31.24,21.27
N$115  (1 unrouted)
  Top 0.203: IC1.44 56.65,33.26 59.2,35.8 62.14,35.8 62.14,42.63 56.2,42.63 R2.1
N$117  (1 unrouted)
N$123
  Top 0.203: R43.1 65.96,35.9 64.83,34.77 59.83,34.77 57.65,32.6 IC1.42
N$127
  Top 0.254: R10.2 18.96,10.5 18.96,11.77 R40.1
  Top 0.406: C14.2 16.42,10.5 16.42,11.77
  Top 1.016: R40.1 16.42,11.77 R31.2
N$129
  Top 0.254: R13.2 18.96,13.04 18.96,13.89 R39.1
  Top 0.406: C13.2 16.42,13.04 16.42,14.31
  Top 1.016: R39.1 16.42,14.31 R32.2
N$130
  Top 1.016: X2.5 R38.2
N$131
  Top 0.203: 54.65,22.19 IC1.13 54.65,21.96 53.23,20.54 | 31.27,18.1 R16.1
  Top 0.254: 53.23,20.54 38.8,20.54
  Top 0.305: 38.8,20.54 36.36,18.1 31.27,18.1
N$132
  Top 0.203: IC1.19 57.65,18.94 54.6,15.89 44.68,15.89 42.24,13.45 40.69,13.45 38.8,11.56 36.53,11.56 34.73,9.77 34.73,5.82 33.07,4.15 R50.2
N$134
  Top 0.203: IC1.14 55.15,21.58 53.97,19.86 | 31.34,15.68 R14.1
  Top 0.254: R14.1 32.51,16.85 36.74,16.85 39.75,19.86 53.97,19.86
N$135
  Top 0.254: R16.2 18.96,18.12 18.96,18.97 R37.1
  Top 0.406: C6.2 16.42,18.12 16.42,19.39
  Top 1.016: R37.1 16.42,19.39 R34.2
N$138
  Top 0.254: R17.2 18.96,20.66 18.96,21.93 R36.1
  Top 0.406: C5.2 16.42,20.66 16.42,21.93
  Top 1.016: R36.1 16.42,21.93 R35.2
N$140
  Top 0.254: R20.1 49.31,11.65 49.74,12.67 56.05,12.67 62.14,18.12 63.51,19.49 63.51,24 62.88,24.63 IC1.26
N$141
  Top 0.203: 63.27,25.12 64.1,24.29 64.15,24.29 64.15,19.29 63.2,18.34 62.95,18.1 62.19,17.34 62.19,11.62
  Top 0.254: IC1.27 63.27,25.12 | 62.46,11.89 62.19,11.62 R19.1
N$142
  Top 0.203: IC1.28 63.48,25.62 64.73,24.37 64.73,19.39 64.73,19.21 64.73,15.17 66.9,13
  Top 0.254: 66.9,13 R12.2
N$143
  Top 1.016: R49.1 X6.2
N$160
  Top 0.203: IC1.15 55.65,20.81 54.22,19.15
  Top 0.305: 54.22,19.15 40.61,19.15 37.17,15.87 34.94,15.87 32.11,13.04 R13.1
N$162
  Top 0.203: IC1.16 56.15,20.03 54.55,18.43
  Top 0.254: 36.74,14.86 35.53,14.86 31.59,10.91 31.59,10.85 R10.1
  Top 0.305: 36.4,14.86 36.74,14.86 38.04,14.86 41.61,18.43 54.55,18.43
N$164
  Top 1.016: R45.2 X2.1
N$165
  Top 0.203: R46.1 71.03,36.63 68.75,34.34 60.01,34.34 58.15,32.49 IC1.41
N$169
  Top 0.203: IC1.17 56.65,19.57 54.81,17.73 | 42.7,17.73 38.88,13.91 35.61,13.91 32.63,10.92 32.63,9.14 32.21,8.72 29.03,8.72 28.27,7.96 21.93,7.96 19.97,5.99 R11.1
  Top 0.305: 54.81,17.73 42.7,17.73
N$170
  Top 1.016: R50.1 X6.1
N$171
  Top 0.203: R47.1 73.57,36.6 70.88,33.91 60.18,33.91 58.65,32.38 IC1.40
N$172
  Top 0.203: IC1.39 59.15,32.27 60.36,33.48 72.49,33.48 76.09,37.07 R48.1
N$173
  Top 0.254: R18.2 18.96,25.74 18.96,26.59 R45.1
  Top 0.406: C4.2 16.42,25.74 16.42,27.01
  Top 1.016: R44.2 16.42,27.01 R45.1
N$174
  Top 1.016: R36.2 X2.3
N$175
  Top 1.016: X2.4 R37.2
N$176
  Top 0.406: R53.2 78.45,18.72 78.45,19.52 80.23,21.3 80.81,21.3 X8.1
  Top 0.813: 80.94,21.21 X8.1
N$177
  Top 0.203: IC1.32 65.34,27.62 67.22,25.74 69.76,25.74 71.9,23.61 71.9,19.37 73.93,17.34 R53.1
N$178
  Top 0.254: R14.2 18.96,15.58 18.96,16.85 R38.1
  Top 0.406: C10.2 16.42,15.58 16.42,16.85
  Top 1.016: R38.1 16.42,16.85 R33.2
N$179
  Top 1.016: X2.6 R39.2
N$180
  Top 0.254: IC2.6 49.55,72.84 48.49,71.78 48.49,70.42 48.55,70.36
  Top 0.813: Q2.1 48.55,70.36 48.55,70.75 C18.1
N$181
  Top 0.254: IC2.5 49.78,73.34 49.44,73.69 48.81,75.18 Q2.2
  Top 0.813: Q2.2 47.11,75.44 C19.1
N$182
  Top 0.813: R65.1 41.67,51.56 X9.3 41.67,55.45 R59.2
N$183  (via drill 0.35 pad 2)
  other vias: 30.39,30.82
N$184
  Top 1.016: X2.7 R40.2
N$186  (1 unrouted)
  Top 0.203: IC2.44 56.65,78.98 59.2,81.52 62.14,81.52 62.14,88.35 56.2,88.35 R71.1
N$187
  Top 0.813: R64.1 X9.4 44.21,55.47 R58.2
N$193
  Top 0.813: R57.2 46.75,55.42 X9.5 46.75,51.29 R63.1
N$194
  Top 0.813: R56.2 49.29,55.47 X9.6 49.29,51.38 R62.1
N$195
  Top 0.813: R61.1 62.13,53.37 X10.3 61.99,55.44 R55.2
N$197
  Top 0.254: R67.1 67.07,55.83 X10.5
  Top 0.813: X10.5 67.07,51.38 R60.1
N$198
  Top 0.254: IC2.21 58.65,64.8 54.79,60.93 45.25,60.93 R59.1
N$199
  Top 1.016: R41.2 X2.8
N$201  (via drill 0.6 pad 2)
  other vias: 3.72,16.85
N$202  (via drill 0.6 pad 2)
  other vias: 3.72,19.39
N$203  (via drill 0.6 pad 2)
  other vias: 3.72,21.93
N$204  (via drill 0.6 pad 2)
  other vias: 3.72,24.47
N$205
  Top 0.813: 51.04,23.42 51.04,24.4 51,24.43 51,23.32 50.52,22.83
N$206
  Top 0.254: IC2.22 59.15,64.03 55.22,60.1 46.93,60.1 R58.1
N$208
  Top 0.254: IC2.25 62.49,69.84 62.84,69.49 62.84,65.81 61.51,64.48 55.56,59.19 48.67,59.19 R57.1
N$209
  Top 0.254: R56.1 49.31,57.37 49.74,58.39 56.05,58.39 62.14,63.84 63.51,65.21 63.51,69.72 62.88,70.35 IC2.26
N$214
  Top 0.203: 63.27,70.84 64.1,70.01 64.15,70.01 64.15,65.01 63.2,64.06 62.95,63.82 62.19,63.06 62.19,57.34
  Top 0.254: IC2.27 63.27,70.84 | 62.46,57.61 62.19,57.34 R55.1
N$217
  Top 0.203: IC2.28 63.48,71.34 64.73,70.09 64.73,65.11 64.73,64.93 64.73,60.89 66.9,58.72
  Top 0.254: 66.9,58.72 R67.2
N$218
  Top 0.203: IC2.34 66.32,74.34 67.86,72.81 70.33,72.81 R105.1
N$220
  Top 0.203: IC2.31 64.16,72.84 67.01,70 R68.1
N$221
  Top 0.203: IC2.30 63.8,72.34 66.21,69.94 66.21,64.38 R69.1
N$222  (1 unrouted)
N$223  (1 unrouted)
N$226  (1 unrouted)
N$227
  Top 0.203: IC2.37 60.15,77.78 61,78.63 61,78.65 75.63,78.65 75.68,78.7 R66.1
N$229  (1 unrouted)
N$230  (1 unrouted)
  Top 0.254: RESET1.1 42.98,70.08 42.77,69.87 42.96,69.87 R72.2
N$231  (1 unrouted)
  Top 1.27: X9.2
N$237  (via drill 1 pad 1.78)
  other vias: 74.73,53.54
N$238
  Top 0.203: IC2.29 63.64,71.84 65.34,70.14 65.34,63.89 | 65.34,63.89 65.32,63.87 | 65.34,63.89 69.52,59.72 R70.2
N$241
  Top 0.254: IC2.7 50,72.34 49.76,72.1 49.76,72.04 49.7,71.98 49.68,71.98 49.65,71.95 49.65,69.77 49.12,69.24 47.54,69.24 46.9,69.87 46.4,69.87 R72.1
N$242
  Top 0.813: R73.3 69.61,50.19 X10.6
N$248  (via drill 0.35 pad 2)  (1 unrouted)
  other vias: 27.85,76.54 25.31,76.54
N$249  (via drill 0.35 pad 2)
  other vias: 30.39,76.54
N$250
  Top 0.203: IC2.11 52.13,70.34 51.98,70.19 51.98,68.35 51.24,67.61 38.01,67.65 36.77,68.9 36.77,71.44 32.47,71.44 32.45,71.46
  Top 0.813: D6.3 32.45,71.46 R83.1
N$257  (1 unrouted)
  Top 0.203: IC2.12 52.9,68.09 51.8,66.99
  Top 0.254: 51.8,66.99 31.24,66.99
  Top 0.305: R82.1 31.24,66.99
N$258
  Top 0.203: 54.65,67.91 IC2.13 54.65,67.68 53.23,66.26 | 31.27,63.82 R81.1
  Top 0.254: 53.23,66.26 38.8,66.26
  Top 0.305: 38.8,66.26 36.36,63.82 31.27,63.82
N$259
  Top 0.203: IC2.14 55.15,67.3 53.97,65.58 | 31.34,61.4 R80.1
  Top 0.254: R80.1 32.51,62.57 36.74,62.57 39.75,65.58 53.97,65.58
N$260
  Top 0.203: IC2.15 55.65,66.53 54.22,64.87
  Top 0.305: 54.22,64.87 40.61,64.87 37.17,61.59 34.94,61.59 32.11,58.76 R79.1
N$261
  Top 0.203: IC2.16 56.15,65.75 54.55,64.15
  Top 0.254: 36.74,60.58 35.53,60.58 31.59,56.63 31.59,56.57 R77.1
  Top 0.305: 36.4,60.58 36.74,60.58 38.04,60.58 41.61,64.15 54.55,64.15
N$262
  Top 0.203: IC2.17 56.65,65.29 54.81,63.45 | 42.7,63.45 38.88,59.63 35.61,59.63 32.63,56.64 32.63,54.86 32.21,54.44 29.03,54.44 28.27,53.68 21.93,53.68 19.97,51.71 R78.1
  Top 0.305: 54.81,63.45 42.7,63.45
N$263  (via drill 0.6 pad 2)
  other vias: 3.72,62.57
N$264  (via drill 0.6 pad 2)
  other vias: 3.72,65.11
N$265  (via drill 0.6 pad 2)
  other vias: 3.72,67.65
N$266  (via drill 0.6 pad 2)
  other vias: 3.72,70.19
N$267
  Top 0.813: 51.04,69.14 51.04,70.12 51,70.15 51,69.04 50.52,68.55
N$268
  Top 0.254: 18.96,54.95 R95.1
  Top 0.406: C38.2 16.42,53.68 16.42,54.95
  Top 1.016: R84.2 16.42,54.95 17.69,54.95 | 17.69,54.95 18.96,54.95 17.98,53.97 R78.2 17.69,53.71 17.69,54.95
N$269
  Top 0.254: R77.2 18.96,56.22 18.96,57.49 R94.1
  Top 0.406: C37.2 16.42,56.22 16.42,57.49
  Top 1.016: R94.1 16.42,57.49 R85.2
N$270
  Top 0.254: R79.2 18.96,58.76 18.96,59.61 R93.1
  Top 0.406: C36.2 16.42,58.76 16.42,60.03
  Top 1.016: R93.1 16.42,60.03 R86.2
N$271
  Top 1.016: X11.5 R92.2
N$272
  Top 0.254: R81.2 18.96,63.84 18.96,64.69 R91.1
  Top 0.406: C34.2 16.42,63.84 16.42,65.11
  Top 1.016: R91.1 16.42,65.11 R88.2
N$273
  Top 0.254: R82.2 18.96,66.38 18.96,67.65 R90.1
  Top 0.406: C33.2 16.42,66.38 16.42,67.65
  Top 1.016: R90.1 16.42,67.65 R89.2
N$274
  Top 1.016: R97.2 X11.1
N$275
  Top 0.254: R83.2 18.96,71.46 18.96,72.31 R97.1
  Top 0.406: C32.2 16.42,71.46 16.42,72.73
  Top 1.016: R96.2 16.42,72.73 R97.1
N$276
  Top 1.016: R90.2 X11.3
N$277
  Top 1.016: X11.4 R91.2
N$278
  Top 0.254: R80.2 18.96,61.3 18.96,62.57 R92.1
  Top 0.406: C35.2 16.42,61.3 16.42,62.57
  Top 1.016: R92.1 16.42,62.57 R87.2
N$279
  Top 1.016: X11.6 R93.2
N$280
  Top 1.016: X11.7 R94.2
N$281
  Top 1.016: R95.2 X11.8
N$282
  Top 2.54: D8.1 12.61,80.35 11.34,81.62 X12.1
N$283  (1 unrouted)
N$284  (1 unrouted)
N$285  (1 unrouted)
N$286
  Top 0.203: R74.1 63.36,81.62 62.66,80.92 59.65,80.92 57.15,78.43 IC2.43
N$287
  Top 0.203: R75.1 65.96,81.62 64.83,80.49 59.83,80.49 57.65,78.32 IC2.42
N$288
  Top 0.203: R98.1 71.03,82.35 68.75,80.06 60.01,80.06 58.15,78.21 IC2.41
N$289
  Top 0.203: R99.1 73.57,82.32 70.88,79.63 60.18,79.63 58.65,78.1 IC2.40
N$290
  Top 0.203: IC2.39 59.15,77.99 60.36,79.2 72.49,79.2 76.09,82.79 R100.1
N$291
  Top 0.203: IC2.18 57.15,64.94 54.7,62.48 42.82,62.48 39.13,58.79 35.73,58.79 33.45,56.51 33.45,54.36 31.51,52.41 R101.2
N$292
  Top 0.203: IC2.19 57.65,64.66 54.6,61.61 44.68,61.61 42.24,59.17 40.69,59.17 38.8,57.28 36.53,57.28 34.73,55.49 34.73,51.54 33.07,49.87 R102.2
N$293
  Top 1.016: R101.1 X14.2
N$294
  Top 1.016: R102.1 X14.1
N$295
  Top 0.203: IC2.46 55.65,80.22 58.33,82.89 R104.2
N$296
  Top 0.203: IC2.45 56.15,79.7 58.53,82.08 59.64,82.08 R103.2
N$297
  Top 0.203: IC2.32 65.34,73.34 67.22,71.46 69.76,71.46 71.9,69.33 71.9,65.09 73.93,63.06 R106.1
N$298  (1 unrouted)
N$299  (1 unrouted)
N$300  (1 unrouted)
N$301  (1 unrouted)
N$302
  Top 0.813: R70.1 79.63,62.06 X16.3
N$303
  Top 0.406: R106.2 78.45,64.44 78.45,65.24 80.23,67.02 80.81,67.02 X16.1
  Top 0.813: 80.94,66.93 X16.1
(copper drawn outside any net)
  shapes: Top area x8